# Altium PCB PCB2.PcbDoc (part 1 of 2)
Units mil, origin at the board's own origin, x right, y up, seen from the top; angles counter-clockwise.
Board outline 3235 x 2995 mil, 2 copper layers (Top Layer, Bottom Layer); 162 components, 122 nets, 435 pads, 185 vias.
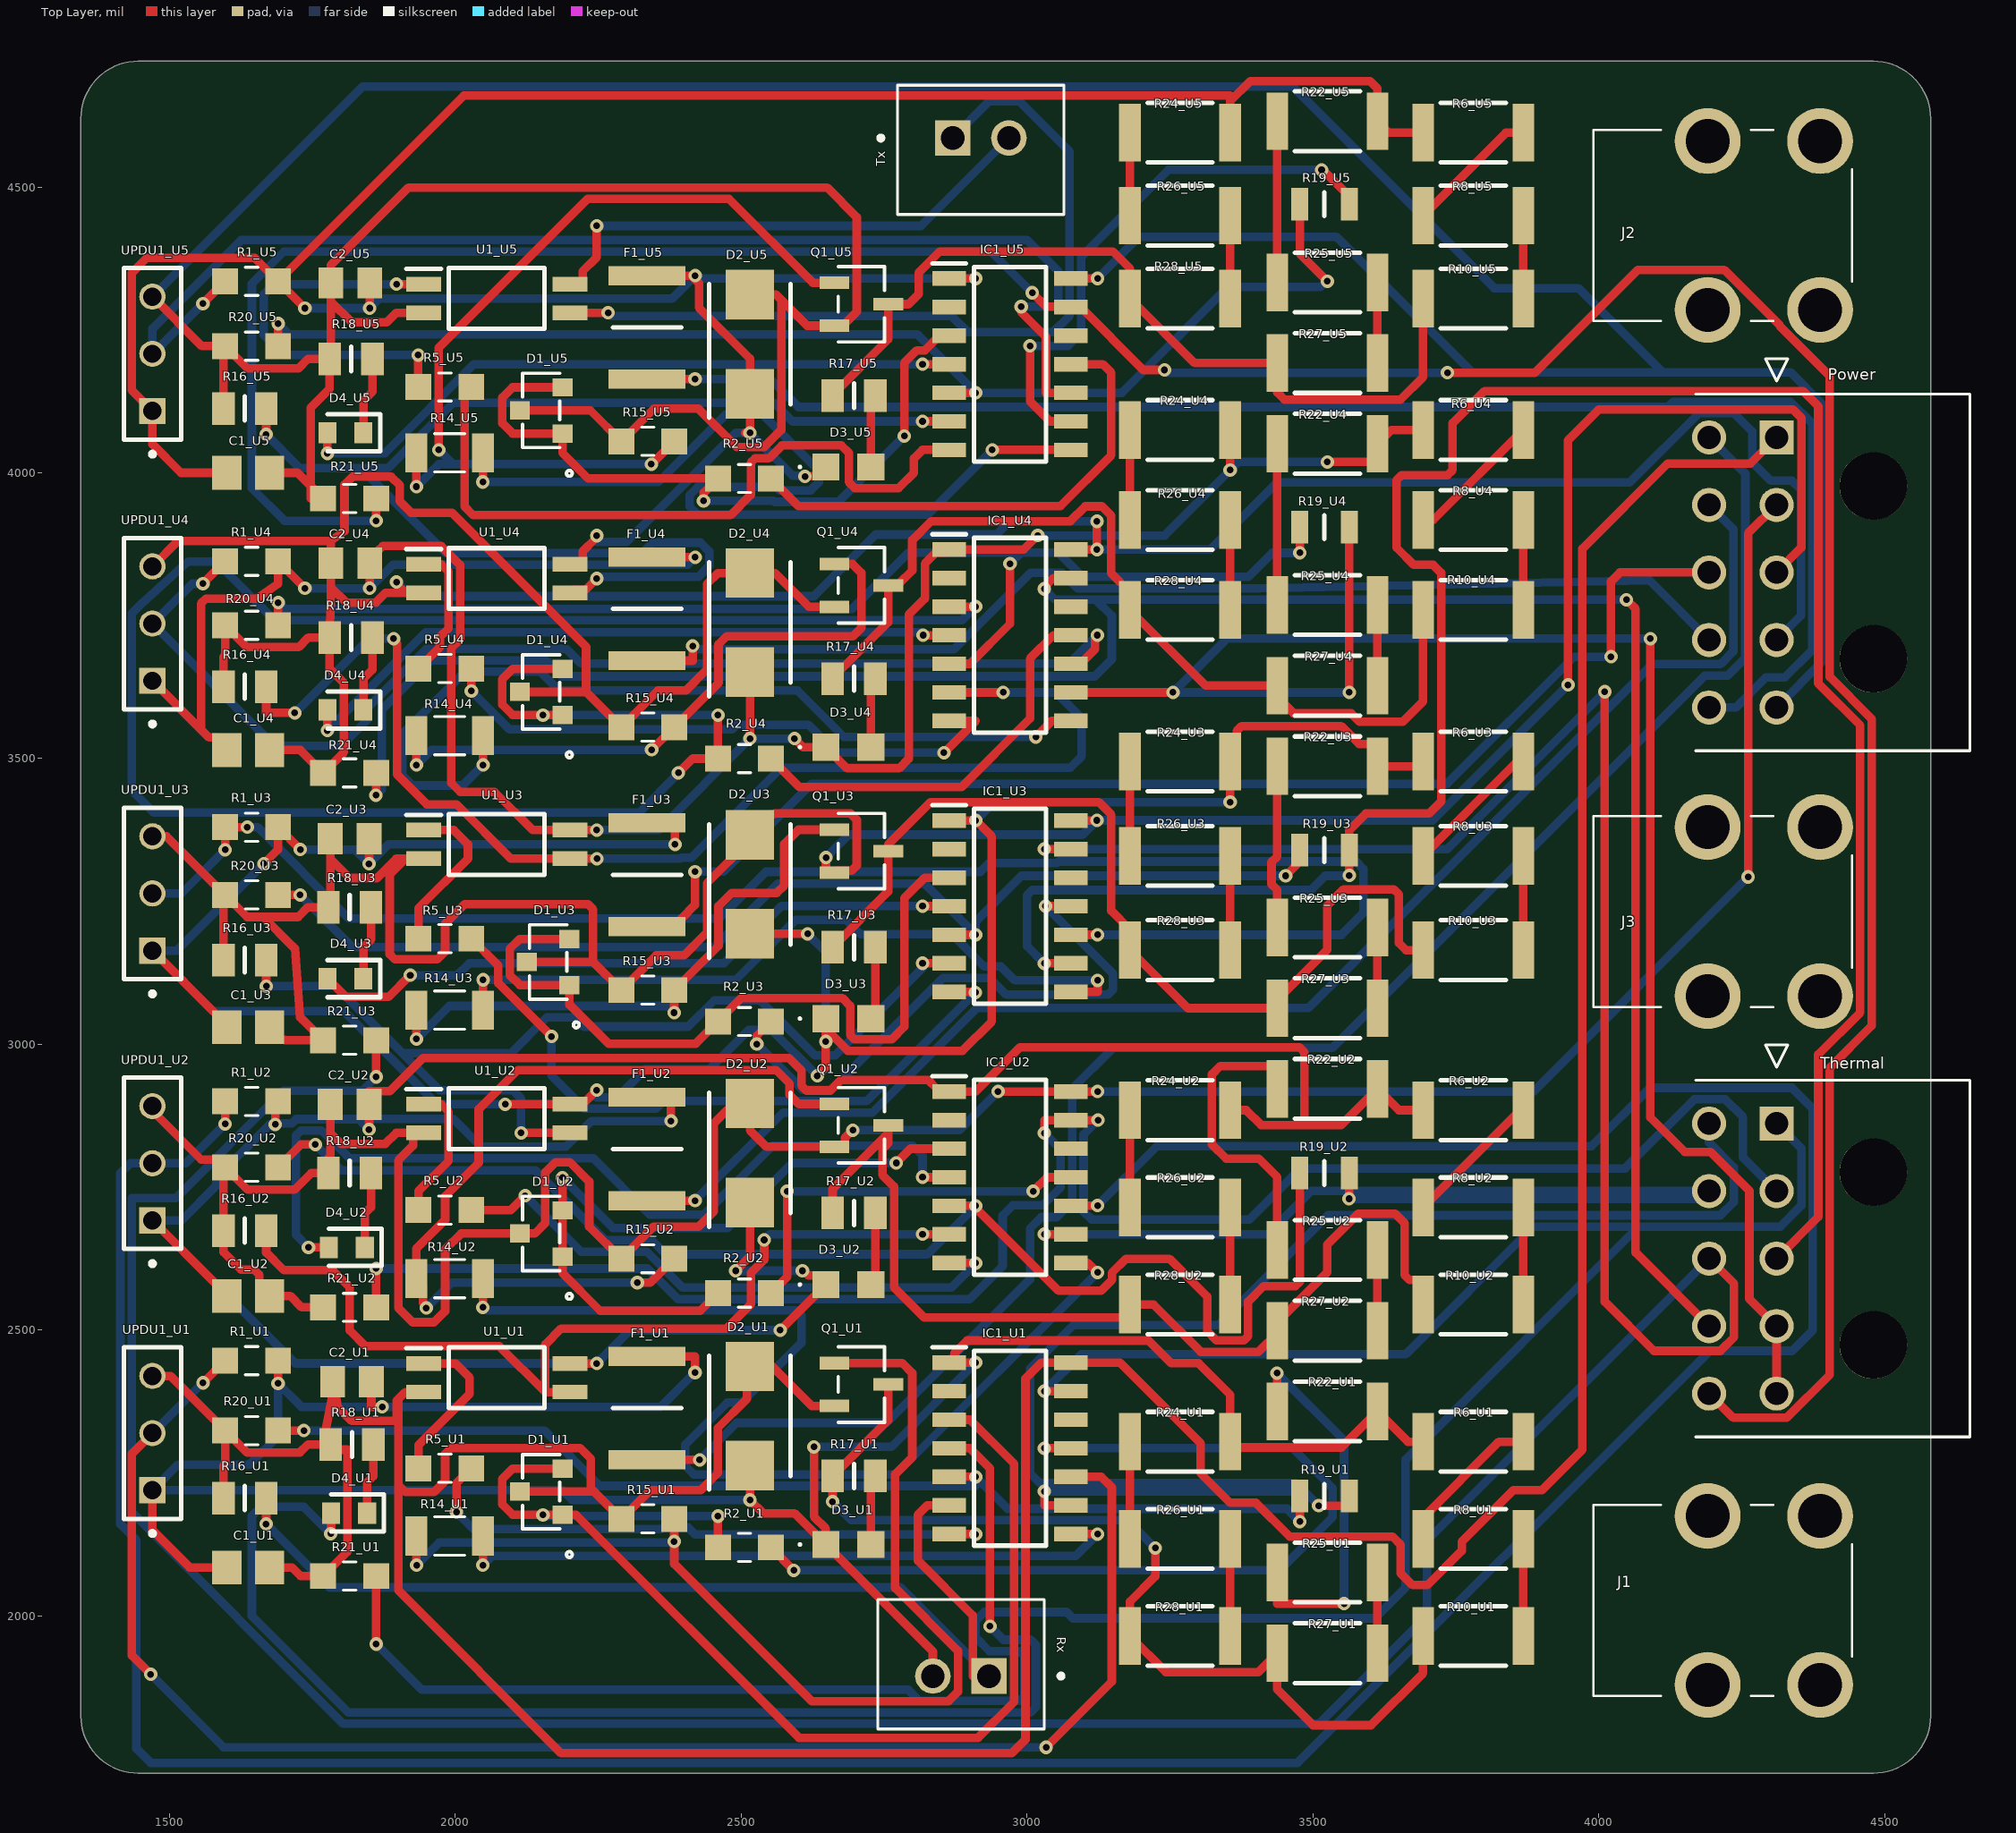
[diagram p0: Top Layer view]
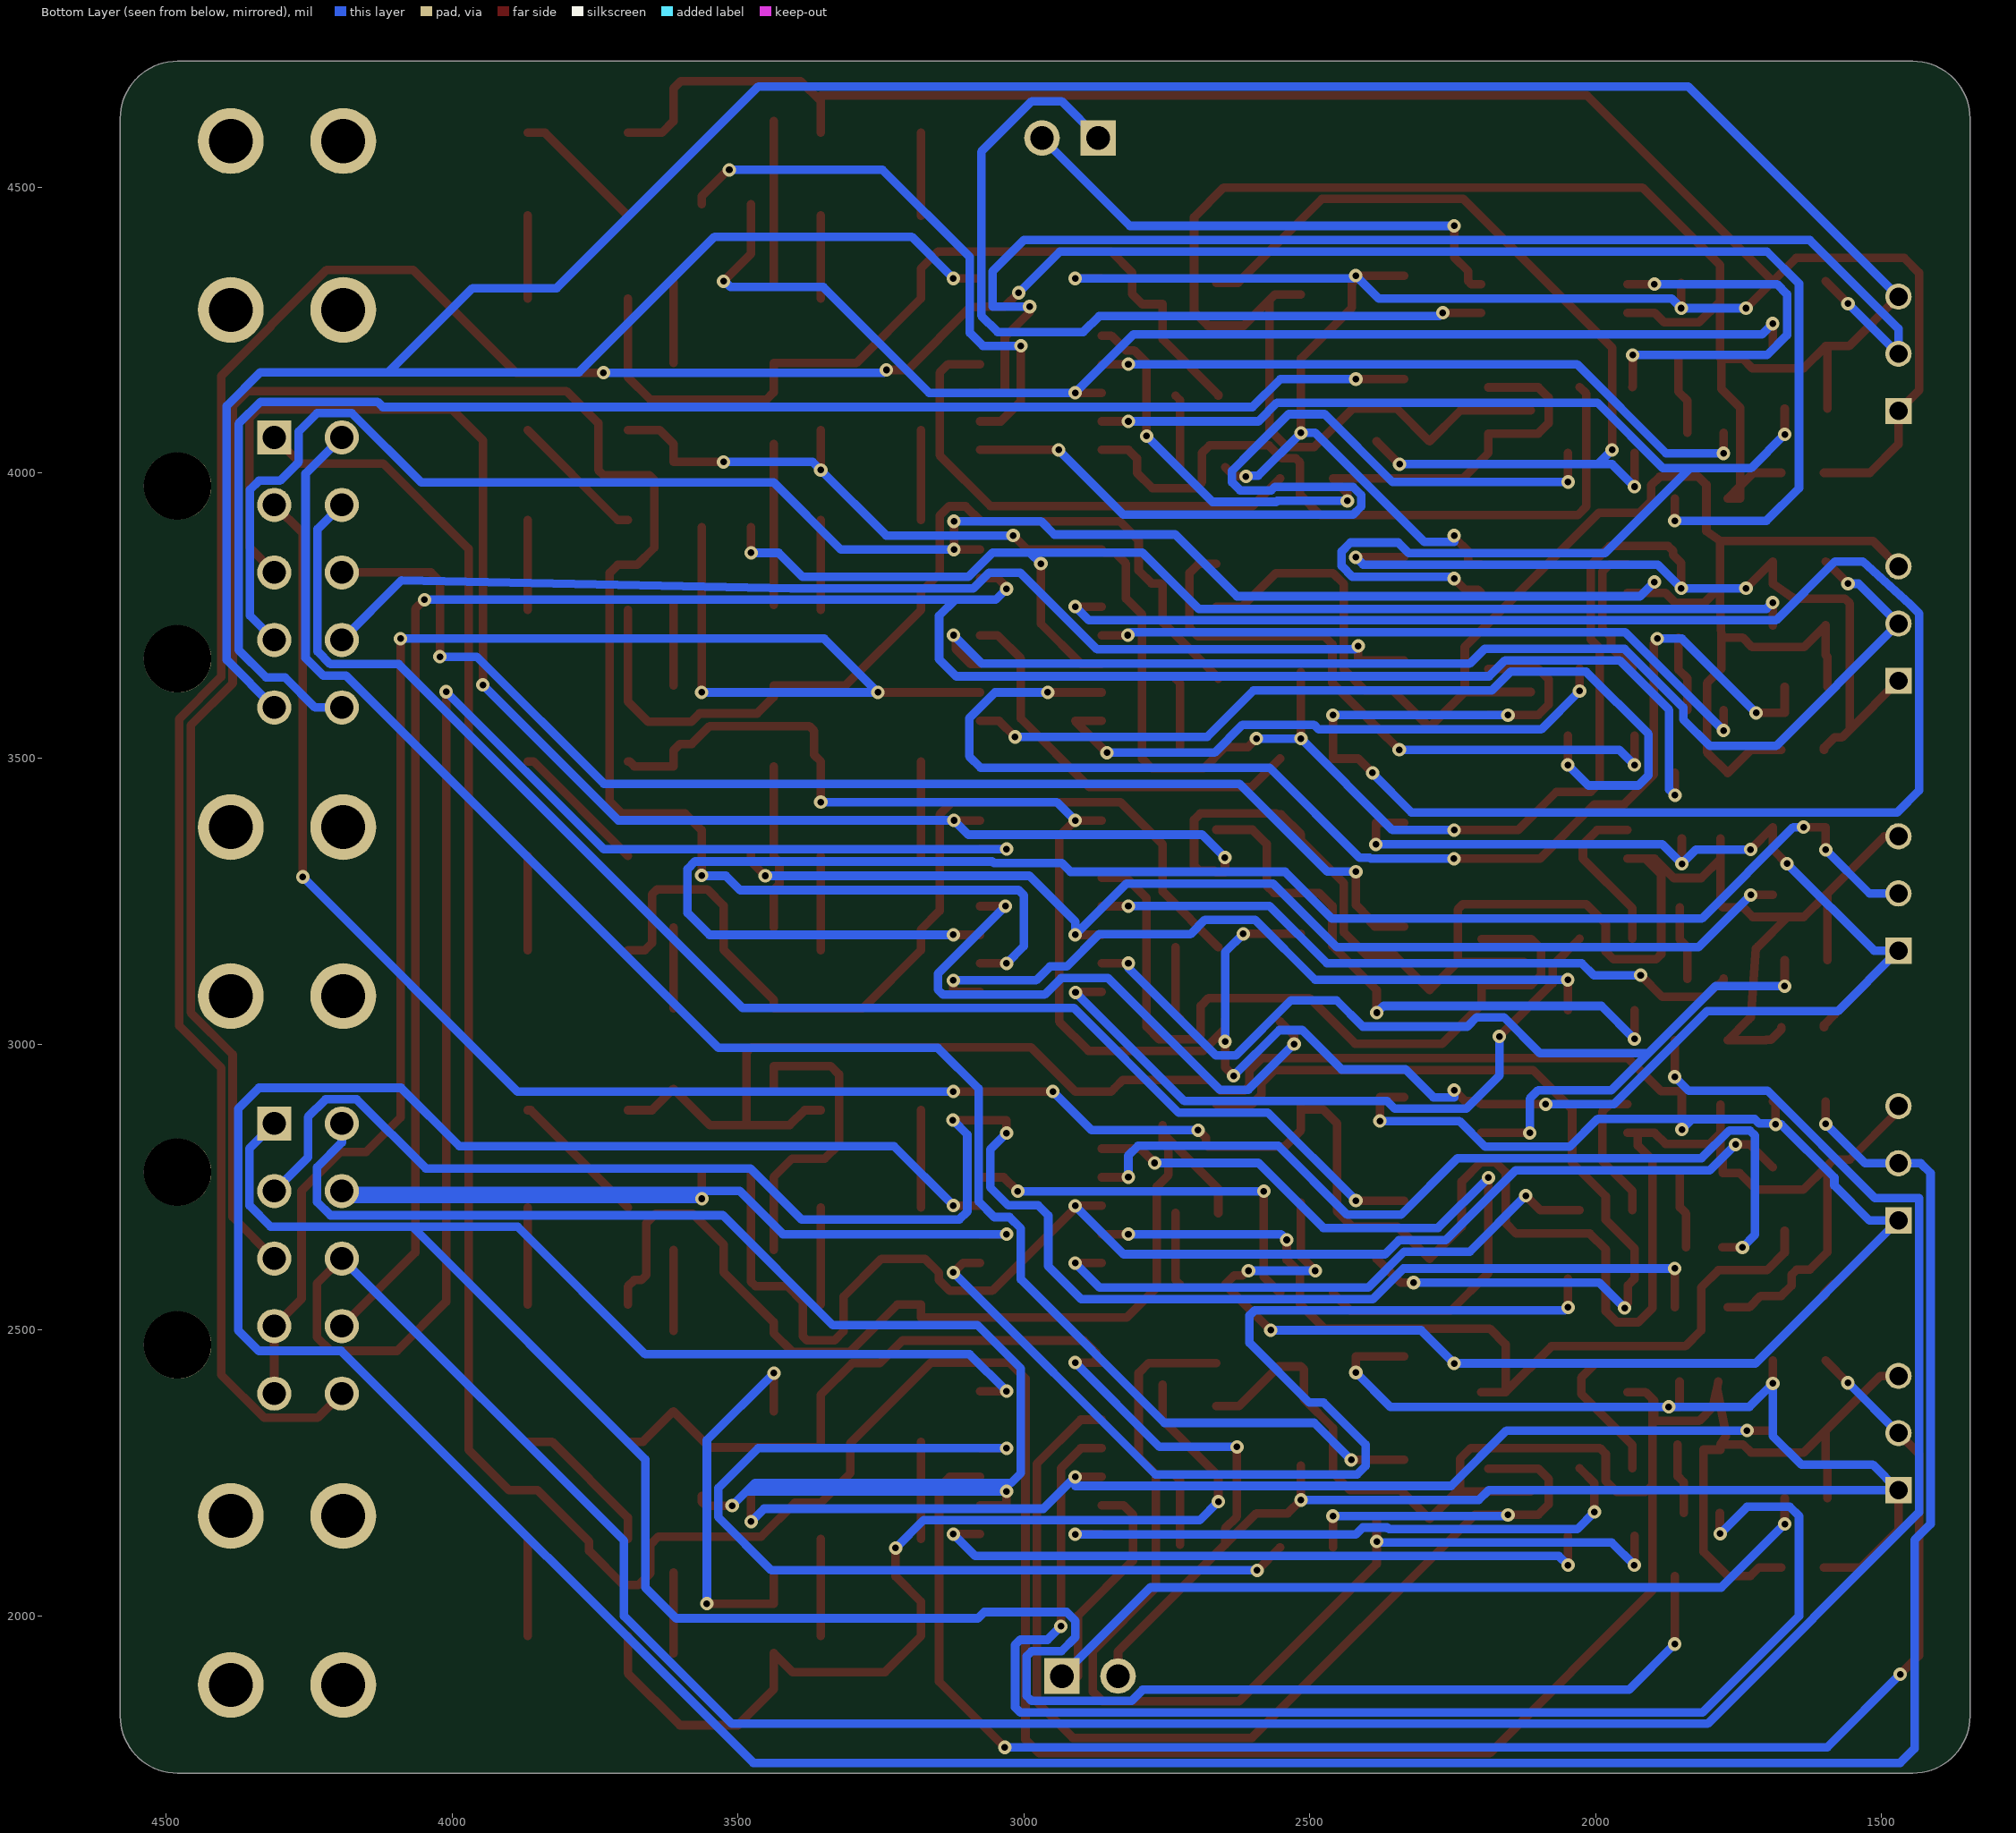
[diagram p1: Bottom Layer view, seen from below]
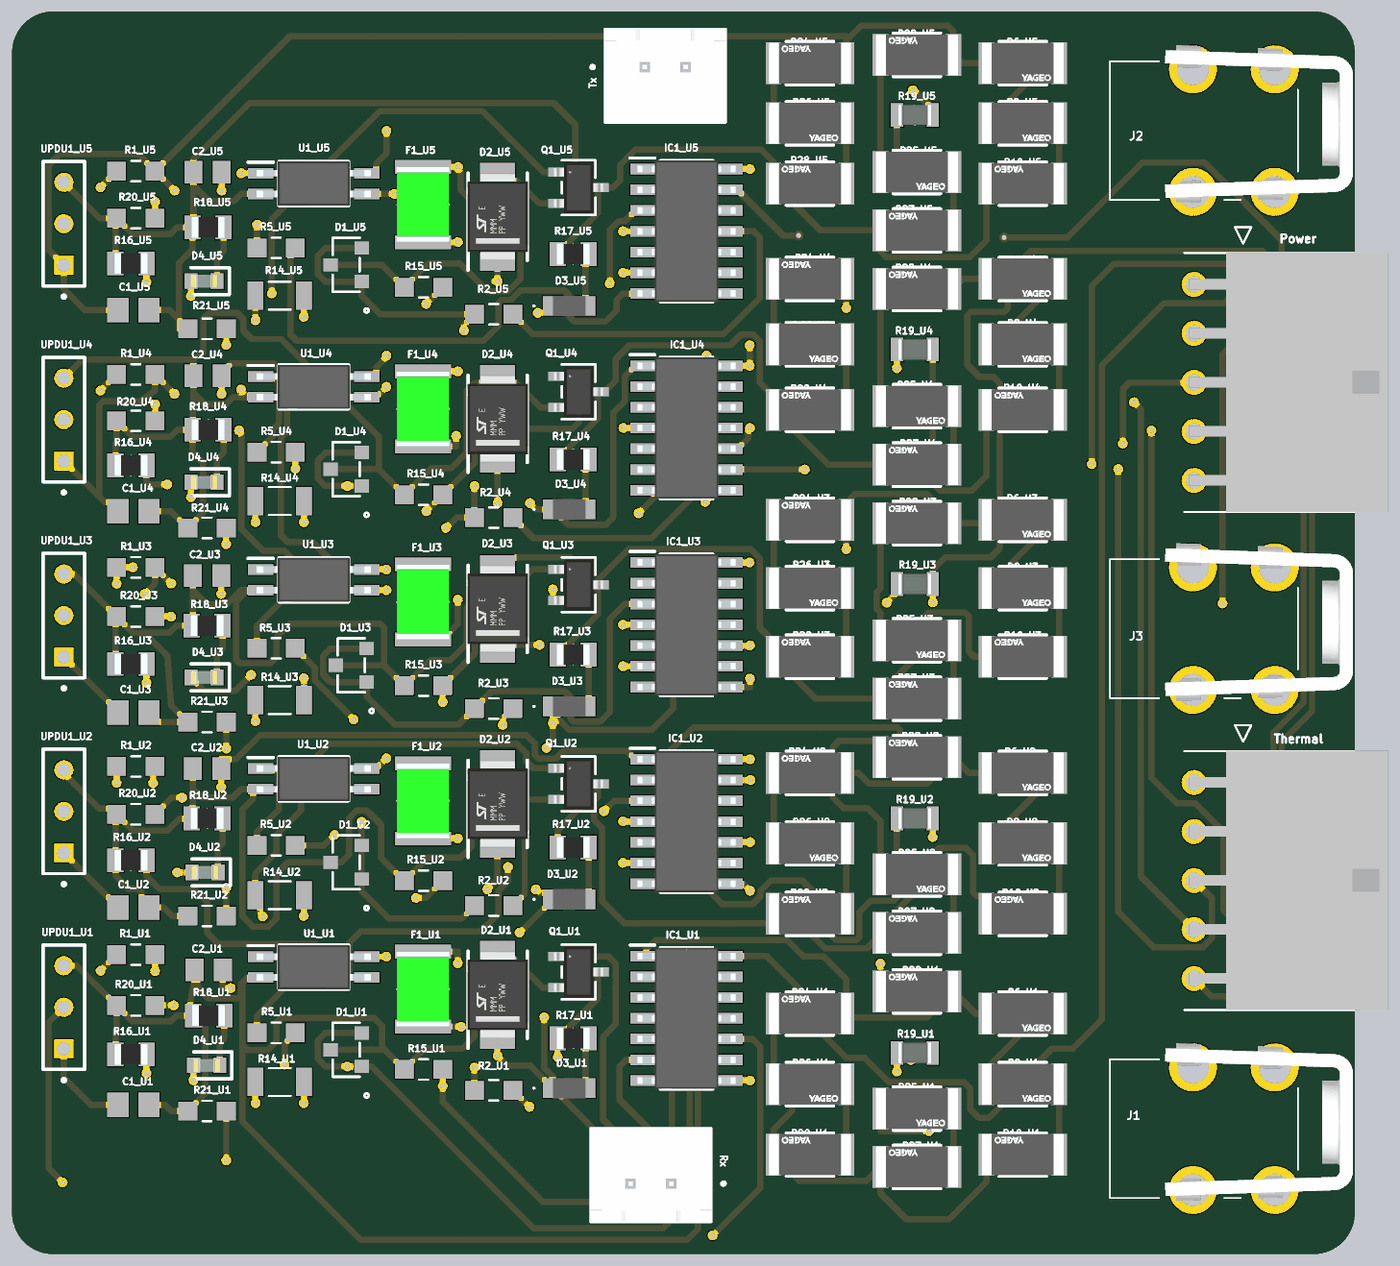
[diagram p3: 3D render of the assembled board from above, using the file's embedded part models]

## Layer stack, top to bottom
Top Solder: solder mask 0.4, Solder Resist, Dk 3.5
Top Layer: signal copper 1.4
Dielectric 1: dielectric 12.6, FR-4, Dk 4.8
Bottom Layer: signal copper 1.4
Bottom Solder: solder mask 0.4, Solder Resist, Dk 3.5

## Board outline
1345,1825 1345,4620 cw(c1445,4620) 1445,4720 4480,4720 cw(c4480,4620) 4580,4620 4580,1825 cw(c4480,1825) 4480,1725 1445,1725 cw(c1445,1825)

## Design rules (kind name [scope] priority, off if disabled: settings)
BoardOutlineClearance [All] p1: gap=7.87 ignorepadtopadclearanceinfootprint=FALSE
Clearance [All] p1: gap=5 ignorepadtopadclearanceinfootprint=FALSE except(9.84: Arc-Hole Track-Hole SMDPad-Hole THPad-Hole Via-Hole Fill-Hole Poly-Hole Region-Hole Text-Hole)
ComponentClearance [All] p1: gap=5 collisioncheckmode=3 verticalgap=5 showdistances=TRUE
DiffPairsRouting [All] p1: maxlimit=10 minlimit=5 mostfreqgap=5 toplayer_minwidth=5 toplayer_maxwidth=1000 toplayer_prefwidth=5 bottomlayer_minwidth=5 bottomlayer_maxwidth=1000 bottomlayer_prefwidth=5 maxuncoupledlength=500
Height [All] p1: minheight=0 maxheight=71497.94 prefheight=500
HoleSize [All] p1: absolutevalues=TRUE maxlimit=248.03 minlimit=11.81 maxpercent=80.000 minpercent=20.000
HoleToHoleClearance [All] p1: gap=9.84 allowstackedmicrovias=FALSE
MinimumAnnularRing [All] p1: minimumring=3
MinimumSolderMaskSliver [All] p1: minsoldermaskwidth=0
PlaneClearance [All] p1: clearance=5
PlaneConnect PlaneConnectPowerPads [InPadClass('PowerPads')] p1: planeconnectstyle=Direct reliefexpansion=20 reliefentries=4 reliefconductorwidth=10 reliefairgap=10
PlaneConnect [All] p2: pad.planeconnectstyle=Relief pad.reliefexpansion=11.81 pad.reliefentries=4 pad.reliefconductorwidth=5 pad.reliefairgap=5 via.planeconnectstyle=Direct via.reliefexpansion=11.81 via.reliefentries=4 via.reliefconductorwidth=5 via.reliefairgap=5
PolygonConnect PolygonConnectPowerPads [All vs (InPadClass('PowerPads'))] p1: connectstyle=Direct reliefconductorwidth=10 reliefentries=4 polygonreliefangle="90 Angle" airgapwidth=10
PolygonConnect [All] p2: thpad.connectstyle=Relief thpad.reliefconductorwidth=5 thpad.reliefentries=4 thpad.polygonreliefangle="90 Angle" thpad.airgapwidth=5 smdpad.connectstyle=Relief smdpad.reliefconductorwidth=5 smdpad.reliefentries=4 smdpad.polygonreliefangle="90 Angle" smdpad.airgapwidth=5 via.connectstyle=Direct via.reliefconductorwidth=5 via.reliefentries=4 via.polygonreliefangle="90 Angle" via.airgapwidth=5
RoutingVias [All] p1: holewidth=11.81 width=23.62 viastyle="Through Hole" minholewidth=11.81 minwidth=23.62 maxholewidth=23.62 maxwidth=259.84
SilkToSilkClearance [All] p1: silktosilkclearance=0
SilkToSolderMaskClearance [IsPad] p1: minsilkscreentomaskgap=5 clearancetoexposedcopper=TRUE
SolderMaskExpansion [All] p1: expansion=2.95 istentingtop=FALSE
Width [All] p1: maxlimit=1000 minlimit=15 preferedwidth=15 minimp=50.000000 maximp=50.000000 favimp=50.000000
20 further rules are at their usual default settings.

## Classes and differential pairs
channel class "Single cell module": U1 U2 U3 U4 U5
component class "Five cell modules": J1 J2 J3 Power Rx Thermal Tx

## Components (designator, comment, footprint, x,y, rotation, side; value= is the part's Value field where it differs from the comment)
C1_U1 "CC0805KRX7R9BB104" CAPC2012X70 1637.6,2085 r180 top (schematic designator C1)
C1_U2 "CC0805KRX7R9BB104" CAPC2012X70 1637.6,2560 r180 top (schematic designator C1)
C1_U3 "CC0805KRX7R9BB104" CAPC2012X70 1637.6,3030 r180 top (schematic designator C1)
C1_U4 "CC0805KRX7R9BB104" CAPC2012X70 1637.6,3515 r180 top (schematic designator C1)
C1_U5 "CC0805KRX7R9BB104" CAPC2012X70 1637.6,4000 r180 top (schematic designator C1)
C2_U1 "CL21A106KAYNNNE" CAPC2012X135N 1818.98,2410 r180 top (schematic designator C2)
C2_U2 "CL21A106KAYNNNE" CAPC2012X135N 1815,2895 r180 top (schematic designator C2)
C2_U3 "CL21A106KAYNNNE" CAPC2012X135N 1815,3360 r180 top (schematic designator C2)
C2_U4 "CL21A106KAYNNNE" CAPC2012X135N 1816.02,3841.99 r180 top (schematic designator C2)
C2_U5 "CL21A106KAYNNNE" CAPC2012X135N 1816.02,4331.99 r180 top (schematic designator C2)
D1_U1 "AZ432ANTR-E1" SOT-23_DIO 2150,2217.56 r90 top (schematic designator D1)
D1_U2 "AZ432ANTR-E1" SOT-23_DIO 2150,2669.27 r90 top (schematic designator D1)
D1_U3 "AZ432ANTR-E1" SOT-23_DIO 2162.21,3144.13 r90 top (schematic designator D1)
D1_U4 "AZ432ANTR-E1" SOT-23_DIO 2150,3616.63 r90 top (schematic designator D1)
D1_U5 "AZ432ANTR-E1" SOT-23_DIO 2150,4109.13 r90 top (schematic designator D1)
D2_U1 "SM6T6V8A" DIOM5436X265N 2515,2350 r90 top (schematic designator D2)
D2_U2 "SM6T6V8A" DIOM5436X265N 2515,2810 r90 top (schematic designator D2)
D2_U3 "SM6T6V8A" DIOM5436X265N 2515,3280 r90 top (schematic designator D2)
D2_U4 "SM6T6V8A" DIOM5436X265N 2515,3738 r90 top (schematic designator D2)
D2_U5 "SM6T6V8A" DIOM5436X265N 2515,4225 r90 top (schematic designator D2)
D3_U1 "598-2105-107F" 5982105107F 2687.2,2125 r180 top (schematic designator D3)
D3_U2 "598-2105-107F" 5982105107F 2687.2,2580 r180 top (schematic designator D3)
D3_U3 "598-2105-107F" 5982105107F 2687.2,3045 r180 top (schematic designator D3)
D3_U4 "598-2105-107F" 5982105107F 2687.2,3520 r180 top (schematic designator D3)
D3_U5 "598-2105-107F" 5982105107F 2687.2,4010 r180 top (schematic designator D3)
D4_U1 "19-217_GHC-YR1S2_3T" LEDC1608X50N 1813.98,2180 r180 top (schematic designator D4)
D4_U2 "19-217_GHC-YR1S2_3T" LEDC1608X50N 1810,2645 r180 top (schematic designator D4)
D4_U3 "19-217_GHC-YR1S2_3T" LEDC1608X50N 1807.64,3115 r180 top (schematic designator D4)
D4_U4 "19-217_GHC-YR1S2_3T" LEDC1608X50N 1807.64,3585 r180 top (schematic designator D4)
D4_U5 "19-217_GHC-YR1S2_3T" LEDC1608X50N 1807.64,4070 r180 top (schematic designator D4)
F1_U1 "MF-MSMF150-2" FUSC4632X85N 2335,2363.72 r90 top (schematic designator F1)
F1_U2 "MF-MSMF150-2" FUSC4632X85N 2335,2817.15 r90 top (schematic designator F1)
F1_U3 "MF-MSMF150-2" FUSC4632X85N 2335,3296.87 r90 top (schematic designator F1)
F1_U4 "MF-MSMF150-2" FUSC4632X85N 2335,3761.87 r90 top (schematic designator F1)
F1_U5 "MF-MSMF150-2" FUSC4632X85N 2335,4254.45 r90 top (schematic designator F1)
IC1_U1 "ATTINY1624-SSU" SOIC127P600X175-14N 2970,2293.45 r0 top (schematic designator IC1)
IC1_U2 "ATTINY1624-SSU" SOIC127P600X175-14N 2970,2767.58 r0 top (schematic designator IC1)
IC1_U3 "ATTINY1624-SSU" SOIC127P600X175-14N 2970,3241.72 r0 top (schematic designator IC1)
IC1_U4 "ATTINY1624-SSU" SOIC127P600X175-14N 2970,3715.86 r0 top (schematic designator IC1)
IC1_U5 "ATTINY1624-SSU" SOIC127P600X175-14N 2970,4190 r0 top (schematic designator IC1)
J1 "7790" 7790 4190,1879.72 r90 top
J2 "7790" 7790 4190,4285 r90 top
J3 "7790" 7790 4190,3084.68 r90 top
Power "212528-1001" 212528-10YY_1 4310.71,4061.94 r90 top
Q1_U1 "AO3400A" SOT-23-3L_AOS 2710,2404.96 r270 top (schematic designator Q1)
Q1_U2 "AO3400A" SOT-23-3L_AOS 2710,2858.38 r270 top (schematic designator Q1)
Q1_U3 "AO3400A" SOT-23-3L_AOS 2710,3338.11 r270 top (schematic designator Q1)
Q1_U4 "AO3400A" SOT-23-3L_AOS 2710,3803.11 r270 top (schematic designator Q1)
Q1_U5 "AO3400A" SOT-23-3L_AOS 2710,4295 r270 top (schematic designator Q1)
R1_U1 "ERA6ARW104V" RES_ERA6ARW104V 1643.5,2446.85 r0 top (schematic designator R1)
R1_U2 "ERA6ARW104V" RES_ERA6ARW104V 1643.5,2900.28 r0 top (schematic designator R1)
R1_U3 "ERA6ARW104V" RES_ERA6ARW104V 1643.5,3380 r0 top (schematic designator R1)
R1_U4 "ERA6ARW104V" RES_ERA6ARW104V 1643.5,3845 r0 top (schematic designator R1)
R1_U5 "ERA6ARW104V" RES_ERA6ARW104V 1643.5,4335 r0 top (schematic designator R1)
R2_U1 "ERJU06J102V" RES_ERJU06J102V 2505.5,2120 r0 top (schematic designator R2)
R2_U2 "ERJU06J102V" RES_ERJU06J102V 2505.5,2565 r0 top (schematic designator R2)
R2_U3 "ERJU06J102V" RES_ERJU06J102V 2505.5,3040 r0 top (schematic designator R2)
R2_U4 "ERJU06J102V" RES_ERJU06J102V 2505.5,3500 r0 top (schematic designator R2)
R2_U5 "ERJU06J102V" RES_ERJU06J102V 2505.5,3990 r0 top (schematic designator R2)
R5_U1 "ERJ6ENF1800V" RES_ERJ6ENF1800V 1981.53,2258.49 r180 top (schematic designator R5)
R5_U2 "ERJ6ENF1800V" RES_ERJ6ENF1800V 1981.53,2710.21 r180 top (schematic designator R5)
R5_U3 "ERJ6ENF1800V" RES_ERJ6ENF1800V 1981.53,3185.07 r180 top (schematic designator R5)
R5_U4 "ERJ6ENF1800V" RES_ERJ6ENF1800V 1981.53,3657.57 r180 top (schematic designator R5)
R5_U5 "ERJ6ENF1800V" RES_ERJ6ENF1800V 1981.53,4150.07 r180 top (schematic designator R5)
R6_U1 "RC2010JK-070RL" FP-RC2010-0_65-IPC_C 3780,2305 r0 top (schematic designator R6)
R6_U2 "RC2010JK-070RL" FP-RC2010-0_65-IPC_C 3780,2885 r0 top (schematic designator R6)
R6_U3 "RC2010JK-070RL" FP-RC2010-0_65-IPC_C 3780,3495 r0 top (schematic designator R6)
R6_U4 "RC2010JK-070RL" FP-RC2010-0_65-IPC_C 3780,4075 r0 top (schematic designator R6)
R6_U5 "RC2010JK-070RL" FP-RC2010-0_65-IPC_C 3780,4595 r0 top (schematic designator R6)
R8_U1 "RC2010JK-070RL" FP-RC2010-0_65-IPC_C 3780,2135 r0 top (schematic designator R8)
R8_U2 "RC2010JK-070RL" FP-RC2010-0_65-IPC_C 3780,2715 r0 top (schematic designator R8)
R8_U3 "RC2010JK-070RL" FP-RC2010-0_65-IPC_C 3780,3330 r0 top (schematic designator R8)
R8_U4 "RC2010JK-070RL" FP-RC2010-0_65-IPC_C 3780,3917.5 r0 top (schematic designator R8)
R8_U5 "RC2010JK-070RL" FP-RC2010-0_65-IPC_C 3780,4450 r0 top (schematic designator R8)
R10_U1 "RC2010JK-070RL" FP-RC2010-0_65-IPC_C 3780,1965 r180 top (schematic designator R10)
R10_U2 "RC2010JK-070RL" FP-RC2010-0_65-IPC_C 3780,2545 r180 top (schematic designator R10)
R10_U3 "RC2010JK-070RL" FP-RC2010-0_65-IPC_C 3780,3165 r180 top (schematic designator R10)
R10_U4 "RC2010JK-070RL" FP-RC2010-0_65-IPC_C 3780,3760 r180 top (schematic designator R10)
R10_U5 "RC2010JK-070RL" FP-RC2010-0_65-IPC_C 3780,4305 r180 top (schematic designator R10)
R14_U1 "RT1206DRD07510RL" RESC3116X65N 1990,2140 r180 top (schematic designator R14)
R14_U2 "RT1206DRD07510RL" RESC3116X65N 1990,2590 r180 top (schematic designator R14)
R14_U3 "RT1206DRD07510RL" RESC3116X65N 1990,3060 r180 top (schematic designator R14)
R14_U4 "RT1206DRD07510RL" RESC3116X65N 1990,3540 r180 top (schematic designator R14)
R14_U5 "RT1206DRD07510RL" RESC3116X65N 1990,4035 r180 top (schematic designator R14)
R15_U1 "ERJP06D1002V" RES_ERJP06D1002V 2336.38,2170 r180 top (schematic designator R15)
R15_U2 "ERJP06D1002V" RES_ERJP06D1002V 2336.38,2625 r180 top (schematic designator R15)
R15_U3 "ERJP06D1002V" RES_ERJP06D1002V 2336.38,3095 r180 top (schematic designator R15)
R15_U4 "ERJP06D1002V" RES_ERJP06D1002V 2336.38,3555 r180 top (schematic designator R15)
R15_U5 "ERJP06D1002V" RES_ERJP06D1002V 2336.38,4055 r180 top (schematic designator R15)
R16_U1 "0805W8F2201T5E" RESC2013X65N 1631.69,2206.42 r0 top (schematic designator R16)
R16_U2 "0805W8F2201T5E" RESC2013X65N 1631.69,2674.23 r0 top (schematic designator R16)
R16_U3 "0805W8F2201T5E" RESC2013X65N 1631.69,3147.47 r0 top (schematic designator R16)
R16_U4 "0805W8F2201T5E" RESC2013X65N 1631.69,3625.81 r0 top (schematic designator R16)
R16_U5 "0805W8F2201T5E" RESC2013X65N 1631.69,4112.47 r0 top (schematic designator R16)
R17_U1 "0805W8F2201T5E" RESC2013X65N 2697.04,2245 r180 top (schematic designator R17)
R17_U2 "0805W8F2201T5E" RESC2013X65N 2697.04,2705 r180 top (schematic designator R17)
R17_U3 "0805W8F2201T5E" RESC2013X65N 2697.04,3170 r180 top (schematic designator R17)
R17_U4 "0805W8F2201T5E" RESC2013X65N 2697.04,3640 r180 top (schematic designator R17)
R17_U5 "0805W8F2201T5E" RESC2013X65N 2697.04,4135 r180 top (schematic designator R17)
R18_U1 "0805W8F2201T5E" RESC2013X65N 1818.98,2300 r180 top (schematic designator R18)
R18_U2 "0805W8F2201T5E" RESC2013X65N 1815,2775 r180 top (schematic designator R18)
R18_U3 "0805W8F2201T5E" RESC2013X65N 1815,3240 r180 top (schematic designator R18)
R18_U4 "0805W8F2201T5E" RESC2013X65N 1817.48,3711.72 r180 top (schematic designator R18)
R18_U5 "0805W8F2201T5E" RESC2013X65N 1817.48,4199.22 r180 top (schematic designator R18)
R19_U1 "NTCS0805E3104GMT" THRMC2012X95N 3520,2210 r180 top (schematic designator R19)
R19_U2 "NTCS0805E3104GMT" THRMC2012X95N 3520,2775 r180 top (schematic designator R19)
R19_U3 "NTCS0805E3104GMT" THRMC2012X95N 3520,3340 r180 top (schematic designator R19)
R19_U4 "NTCS0805E3104GMT" THRMC2012X95N 3520,3905 r180 top (schematic designator R19)
R19_U5 "NTCS0805E3104GMT" THRMC2012X95N 3520,4470 r180 top (schematic designator R19)
R20_U1 "ERJP06D1002V" RES_ERJP06D1002V 1643.5,2324.44 r0 top (schematic designator R20)
R20_U2 "ERJP06D1002V" RES_ERJP06D1002V 1643.5,2785.06 r0 top (schematic designator R20)
R20_U3 "ERJP06D1002V" RES_ERJP06D1002V 1643.5,3261.54 r0 top (schematic designator R20)
R20_U4 "ERJP06D1002V" RES_ERJP06D1002V 1643.5,3733.21 r0 top (schematic designator R20)
R20_U5 "ERJP06D1002V" RES_ERJP06D1002V 1643.5,4221.54 r0 top (schematic designator R20)
R21_U1 "ERJP06D1002V" RES_ERJP06D1002V 1815,2070 r0 top (schematic designator R21)
R21_U2 "ERJP06D1002V" RES_ERJP06D1002V 1815,2540 r0 top (schematic designator R21)
R21_U3 "ERJP06D1002V" RES_ERJP06D1002V 1815,3007.26 r0 top (schematic designator R21)
R21_U4 "ERJP06D1002V" RES_ERJP06D1002V 1815,3475 r0 top (schematic designator R21)
R21_U5 "ERJP06D1002V" RES_ERJP06D1002V 1815,3955 r0 top (schematic designator R21)
R22_U1 "RC2010JK-070RL" FP-RC2010-0_65-IPC_C 3525,2358.16 r180 top (schematic designator R22)
R22_U2 "RC2010JK-070RL" FP-RC2010-0_65-IPC_C 3525,2922.37 r180 top (schematic designator R22)
R22_U3 "RC2010JK-070RL" FP-RC2010-0_65-IPC_C 3525,3486.58 r180 top (schematic designator R22)
R22_U4 "RC2010JK-070RL" FP-RC2010-0_65-IPC_C 3525,4050.79 r180 top (schematic designator R22)
R22_U5 "RC2010JK-070RL" FP-RC2010-0_65-IPC_C 3525,4615 r180 top (schematic designator R22)
R24_U1 "RC2010JK-070RL" FP-RC2010-0_65-IPC_C 3267.32,2305 r180 top (schematic designator R24)
R24_U2 "RC2010JK-070RL" FP-RC2010-0_65-IPC_C 3267.32,2885 r180 top (schematic designator R24)
R24_U3 "RC2010JK-070RL" FP-RC2010-0_65-IPC_C 3267.32,3495 r180 top (schematic designator R24)
R24_U4 "RC2010JK-070RL" FP-RC2010-0_65-IPC_C 3267.32,4075 r180 top (schematic designator R24)
R24_U5 "RC2010JK-070RL" FP-RC2010-0_65-IPC_C 3267.32,4595 r180 top (schematic designator R24)
R25_U1 "RC2010JK-070RL" FP-RC2010-0_65-IPC_C 3525,2076.05 r0 top (schematic designator R25)
R25_U2 "RC2010JK-070RL" FP-RC2010-0_65-IPC_C 3525,2640.26 r0 top (schematic designator R25)
R25_U3 "RC2010JK-070RL" FP-RC2010-0_65-IPC_C 3525,3204.47 r0 top (schematic designator R25)
R25_U4 "RC2010JK-070RL" FP-RC2010-0_65-IPC_C 3525,3768.68 r0 top (schematic designator R25)
R25_U5 "RC2010JK-070RL" FP-RC2010-0_65-IPC_C 3525,4332.89 r0 top (schematic designator R25)
R26_U1 "RC2010JK-070RL" FP-RC2010-0_65-IPC_C 3267.32,2135 r0 top (schematic designator R26)
R26_U2 "RC2010JK-070RL" FP-RC2010-0_65-IPC_C 3267.32,2715 r0 top (schematic designator R26)
R26_U3 "RC2010JK-070RL" FP-RC2010-0_65-IPC_C 3267.32,3330 r0 top (schematic designator R26)
R26_U4 "RC2010JK-070RL" FP-RC2010-0_65-IPC_C 3267.32,3917.5 r0 top (schematic designator R26)
R26_U5 "RC2010JK-070RL" FP-RC2010-0_65-IPC_C 3267.32,4450 r0 top (schematic designator R26)
R27_U1 "RC2010JK-070RL" FP-RC2010-0_65-IPC_C 3525,1935 r180 top (schematic designator R27)
R27_U2 "RC2010JK-070RL" FP-RC2010-0_65-IPC_C 3525,2499.21 r180 top (schematic designator R27)
R27_U3 "RC2010JK-070RL" FP-RC2010-0_65-IPC_C 3525,3063.42 r180 top (schematic designator R27)
R27_U4 "RC2010JK-070RL" FP-RC2010-0_65-IPC_C 3525,3627.63 r180 top (schematic designator R27)
R27_U5 "RC2010JK-070RL" FP-RC2010-0_65-IPC_C 3525,4191.84 r180 top (schematic designator R27)
R28_U1 "RC2010JK-070RL" FP-RC2010-0_65-IPC_C 3267.32,1965 r180 top (schematic designator R28)
R28_U2 "RC2010JK-070RL" FP-RC2010-0_65-IPC_C 3267.32,2545 r180 top (schematic designator R28)
R28_U3 "RC2010JK-070RL" FP-RC2010-0_65-IPC_C 3267.32,3165 r180 top (schematic designator R28)
R28_U4 "RC2010JK-070RL" FP-RC2010-0_65-IPC_C 3267.32,3760 r180 top (schematic designator R28)
R28_U5 "RC2010JK-070RL" FP-RC2010-0_65-IPC_C 3267.32,4305 r180 top (schematic designator R28)
Rx "B2B-XH-A(LF)(SN)" JST_B2B-XH-A(LF)(SN) 2884.21,1915.67 r0 top
Thermal "212528-1001" 212528-10YY_1 4310.71,2861.62 r90 top
Tx "B2B-XH-A(LF)(SN)" JST_B2B-XH-A(LF)(SN) 2918.72,4565 r180 top
U1_U1 "EL3H7_B__TA_-G" SOIC127P700X200-4N 2072.09,2416.87 r0 top (schematic designator U1)
U1_U2 "EL3H7_B__TA_-G" SOIC127P700X200-4N 2072.09,2870.29 r0 top (schematic designator U1)
U1_U3 "EL3H7_B__TA_-G" SOIC127P700X200-4N 2072.09,3350.02 r0 top (schematic designator U1)
U1_U4 "EL3H7_B__TA_-G" SOIC127P700X200-4N 2072.09,3815.02 r0 top (schematic designator U1)
U1_U5 "EL3H7_B__TA_-G" SOIC127P700X200-4N 2072.09,4305.02 r0 top (schematic designator U1)
UPDU1_U1 "TS-103-T-A-1" SAMTEC_TS-103-T-A-1 1470,2320.02 r90 top (schematic designator UPDU1)
UPDU1_U2 "TS-103-T-A-1" SAMTEC_TS-103-T-A-1 1470,2792.06 r90 top (schematic designator UPDU1)
UPDU1_U3 "TS-103-T-A-1" SAMTEC_TS-103-T-A-1 1470,3264.09 r90 top (schematic designator UPDU1)
UPDU1_U4 "TS-103-T-A-1" SAMTEC_TS-103-T-A-1 1470,3736.13 r90 top (schematic designator UPDU1)
UPDU1_U5 "TS-103-T-A-1" SAMTEC_TS-103-T-A-1 1470,4208.17 r90 top (schematic designator UPDU1)

## Footprints (in the part's own frame and the unit in brackets; to place one, negate y for a bottom-side part, rotate by r counter-clockwise, add the part's x,y. Pads: shape width x height; smd on the part's side, far side on the other; paste and mask are expansions set on the pad)
7790 [mm]
  round 2.925 hole 1.95: 1(0,0) 2(7.5,0) 3(0,-5) 4(7.5,-5)
  silkscreen extent -0.5,-6.42 8,5.08, body extent -0.67,-9.8 8.97,1.71, height 11.73
212528-10YY_1 [mm]
  rect 1.52x1.52 hole 1.02: 1(0,0)
  round 1.52 hole 1.02: 2(-3,0) 3(-6,0) 4(-9,0) 5(-12,0) 6(0,3) 7(-3,3) 8(-6,3) 9(-9,3) 10(-12,3)
  round 3 hole 3 unplated: 11(-2.16,-4.3) 12(-9.84,-4.3)
  silkscreen extent -13.93,-8.59 3.5,3.59, body extent -13.92,-8.88 1.93,3.3, height 8.75
5982105107F [mm]
  rect 1.2x1.2 smd: 1(1,0) 2(-1,0)
  silkscreen extent 2.1,-0.05 2.2,0.05, body extent -1,-0.63 1,0.63, height 0.91
CAPC2012X70 [mm]
  rect 1.3x1.5 smd: 1(-0.95,0) 2(0.95,0)
CAPC2012X135N [mm]
  rect 1.1x1.38 smd: 1(-0.863,0) 2(0.863,0)
DIOM5436X265N [mm]
  rect 2.2x2.15 smd: 1(-2.2,0) 2(2.2,0)
  silkscreen extent -3.27,-1.81 2.68,1.81, body extent -2.68,-1.86 2.68,1.86, height 2.33
FP-RC2010-0_65-IPC_C [mil]
  rect 37.72x100.72 smd paste+0 mask+0: 1(-87.68,0) 2(87.68,0)
  silkscreen extent -57,-52 57,52, body extent -110,-56 110,56, height 10
FUSC4632X85N [mm]
  rect 0.85x3.43 smd: 1(-2.3,0) 2(2.3,0)
  silkscreen extent 0,-1.52 0,1.52, body extent -2.27,-1.62 2.27,1.62, height 0.85
JST_B2B-XH-A(LF)(SN) [mm]
  rect 1.575x1.575 / inner round 1.575 / far side rect 1.575x1.575 hole 1.05: 1(1.25,-0.525)
  round 1.575 hole 1.05: 2(-1.25,-0.525)
  silkscreen extent -3.7,-2.87 4.54,2.88, body extent -3.7,-2.88 3.7,2.88, height 7
LEDC1608X50N [mm]
  rect 0.8x0.95 smd: 1(-0.8,0) 2(0.8,0)
  silkscreen extent -1.55,-0.82 0.8,0.82, body extent -0.82,-0.4 0.82,0.4, height 0.4
RES_ERA6ARW104V [mm]
  rect 1.15x1.15 smd: 1(-1.175,0) 2(1.175,0)
  silkscreen extent -0.28,-0.62 0.28,0.62
RES_ERJ6ENF1800V [mm]
  rect 1.15x1.15 smd: 1(-1.175,0) 2(1.175,0)
  silkscreen extent -0.28,-0.63 0.28,0.62
RES_ERJP06D1002V [mm]
  rect 1.15x1.15 smd: 1(-1.175,0) 2(1.175,0)
  silkscreen extent -0.28,-0.62 0.28,0.62
RES_ERJU06J102V [mm]
  rect 1.15x1.15 smd: 1(-1.175,0) 2(1.175,0)
  silkscreen extent -0.28,-0.62 0.28,0.62
RESC2013X65N [mm]
  rect 1x1.45 smd: 1(-0.95,0) 2(0.95,0)
  silkscreen extent 0,-0.54 0,0.54, body extent -1,-0.64 1,0.64, height 0.65
RESC3116X65N [mm]
  rect 0.97x1.73 smd: 1(-1.48,0) 2(1.48,0)
  silkscreen extent -0.67,-0.85 0.67,0.85
SAMTEC_TS-103-T-A-1 [mil]
  rect 45.78x45.78 / inner round 45.78 / far side rect 45.78x45.78 hole 32: 01(-100,0)
  round 45.78 hole 32: 02(0,0) 03(100,0)
  silkscreen extent -180,-50 150,50
SOIC127P600X175-14N [mm]
  rect 1.5x0.65 smd: 1(-2.7,3.81) 2(-2.7,2.54) 3(-2.7,1.27) 4(-2.7,0) 5(-2.7,-1.27) 6(-2.7,-2.54) 7(-2.7,-3.81) 8(2.7,-3.81) 9(2.7,-2.54) 10(2.7,-1.27) 11(2.7,0) 12(2.7,1.27) 13(2.7,2.54) 14(2.7,3.81)
  silkscreen extent -3.45,-4.32 1.6,4.49, body extent -3,-4.33 3,4.33, height 1.75
SOIC127P700X200-4N [mm]
  rect 1.55x0.65 smd: 1(-3.25,0.635) 2(-3.25,-0.635) 3(3.25,-0.635) 4(3.25,0.635)
  silkscreen extent -4.02,-1.35 2.13,1.35, body extent -3.5,-1.35 3.5,1.35, height 2
SOT-23-3L_AOS [mil]
  rect 22x52 smd paste+0 mask+0: 1(-37.5,-47) 2(37.5,-47) 3(0,47)
  silkscreen extent -66,-41 66,41, body extent -61,-59 61,59, height 49
SOT-23_DIO [mil]
  rect 32x35 smd paste+0 mask+0: 1(-40.35,-37.2) 2(40.36,-37.2) 3(0,37.21)
  silkscreen extent -115,-54 65,33
THRMC2012X95N [mm]
  rect 0.75x1.45 smd: 1(-1.1,0) 2(1.1,0)
  silkscreen extent 0,-0.53 0,0.53, body extent -1,-0.63 1,0.63, height 0.95

## Part data
C1_U1 C1_U2 C1_U3 C1_U4 C1_U5: "0.1ÂµF Â±10% 50V Ceramic Capacitor X7R 0805 _2012 Metric_", Package="0805 Yageo", Availability=Unavailable, MF=Yageo, MP=CC0805KRX7R9BB104, Price=None, SnapEDA_Link=https://www.snapeda.com/parts/CC0805KRX7R9BB104/Yageo/view-part/105548/?ref=snap
C2_U1 C2_U2 C2_U3 C2_U4 C2_U5: "10ÂµF Â±10% 25V Ceramic Capacitor X5R 0805 (2012 Metric)", Package="0805 Samsung", Check_prices=https://www.snapeda.com/parts/CL21A106KAYNNNE/Samsung/view-part/3598482/?ref=eda, Digi-Key_Part_Number=1276-2891-1-ND, MF=Samsung, MP=CL21A106KAYNNNE, SnapEDA_Link=https://www.snapeda.com/parts/CL21A106KAYNNNE/Samsung/view-part/3598482/?ref=snap
D1_U1 D1_U2 D1_U3 D1_U4 D1_U5: "No Description Available", Mfr_Name="Diodes Inc", RefDes=RefDes, Type=Type
D2_U1 D2_U2 D2_U3 D2_U4 D2_U5: "TVS Diode (Uni-directional)", Manufacturer_Name=STMicroelectronics, Mouser Part Number=511-SM6T6V8A, Arrow Part Number=SM6T6V8A, Arrow Price/Stock=https://www.arrow.com/en/products/sm6t6v8a/stmicroelectronics?region=nac, Datasheet Link=https://www.st.com/resource/en/datasheet/sm6t100a.pdf, Height=2.65mm, Manufacturer_Part_Number=SM6T6V8A, Mouser Price/Stock=https://www.mouser.co.uk/ProductDetail/STMicroelectronics/SM6T6V8A?qs=gFQxgRPje42DFJYRsrsouA%3D%3D
D3_U1 D3_U2 D3_U3 D3_U4 D3_U5: "LED", Manufacturer_Name=Dialight, Datasheet Link=https://s3-us-west-2.amazonaws.com/catsy.557/C18686.pdf, Height=0.8128mm, Manufacturer_Part_Number=598-2105-107F
D4_U1 D4_U2 D4_U3 D4_U4 D4_U5: "LED", Arrow Part Number=19-217/GHC-YR1S2/3T, Manufacturer_Name=Everlight, Mouser Part Number=638-19217GHCYR1S23T, Arrow Price/Stock=https://www.arrow.com/en/products/19-217ghc-yr1s23t/everlight-electronics, Datasheet Link=https://www.mouser.co.uk/datasheet/2/143/19-217-GHC-YR1S2-3T-1663276.pdf, Height=0.5mm, Manufacturer_Part_Number=19-217/GHC-YR1S2/3T, Mouser Price/Stock=https://www.mouser.co.uk/ProductDetail/Everlight/19-217-GHC-YR1S2-3T?qs=8cKuZ6Ok2lZjmFTUzVFjDg%3D%3D
F1_U1 F1_U2 F1_U3 F1_U4 F1_U5: "Fuse", Manufacturer_Name=Bourns, Mouser Part Number=652-MF-MSMF150-2, Arrow Part Number=MF-MSMF150-2, Arrow Price/Stock=https://www.arrow.com/en/products/mf-msmf150-2/bourns?region=nac, Datasheet Link=https://componentsearchengine.com/Datasheets/2/MF-MSMF150-2.pdf, Height=0.85mm, Manufacturer_Part_Number=MF-MSMF150-2, Mouser Price/Stock=https://www.mouser.co.uk/ProductDetail/Bourns/MF-MSMF150-2?qs=VJkZAnU6DY2RTCSZT8Bxqg%3D%3D
IC1_U1 IC1_U2 IC1_U3 IC1_U4 IC1_U5: "Integrated Circuit", Manufacturer_Name=Microchip, Mouser Part Number=556-ATTINY1624-SSU, Arrow Part Number=ATTINY1624-SSU, Arrow Price/Stock=https://www.arrow.com/en/products/attiny1624-ssu/microchip-technology?region=nac, Datasheet Link=https://ww1.microchip.com/downloads/en/DeviceDoc/ATtiny1624-26-27-DataSheet-DS40002234A.pdf, Height=1.75mm, Manufacturer_Part_Number=ATTINY1624-SSU, Mouser Price/Stock=https://www.mouser.co.uk/ProductDetail/Microchip-Technology/ATTINY1624-SSU?qs=vmHwEFxEFR%2FHKYGUmUC%2Fzw%3D%3D
J1 J2 J3: "Connector", Manufacturer_Name="Keystone Electronics", Mouser Part Number=534-7790, Arrow Part Number=7790, Arrow Price/Stock=https://www.arrow.com/en/products/7790/keystone-electronics?region=europe, Datasheet Link=https://www.digikey.co.uk/product-detail/en/keystone-electronics/7790/36-7790-ND/2171010, Height=7.9mm, Manufacturer_Part_Number=7790, Mouser Price/Stock=https://www.mouser.co.uk/ProductDetail/Keystone-Electronics/7790?qs=zBlGwAMnvtdjBTIaaitQnQ%3D%3D
Power Thermal: "Connector", Manufacturer_Name=Molex, Mouser Part Number=538-212528-1001, Datasheet Link=https://www.molex.com/pdm_docs/sd/2125280200_sd.pdf, Height=8.8mm, Manufacturer_Part_Number=212528-1001, Mouser Price/Stock=https://www.mouser.co.uk/ProductDetail/Molex/212528-1001?qs=W%2FMpXkg%252BdQ4hWZ2b%252Bpt5GQ%3D%3D
Q1_U1 Q1_U2 Q1_U3 Q1_U4 Q1_U5: "No Description Available", Mfr_Name="Alpha and Omega Semiconductor", RefDes=RefDes, Type=Type
R1_U1 R1_U2 R1_U3 R1_U4 R1_U5 R2_U1 R2_U2 R2_U3 R2_U4 R2_U5 R5_U1 R5_U2 R5_U3 R5_U4 R5_U5 R15_U1 R15_U2 R15_U3 R15_U4 R15_U5 R20_U1 R20_U2 R20_U3 R20_U4 R20_U5 R21_U1 R21_U2 R21_U3 R21_U4 R21_U5: Package=None, Availability=Unavailable, Price=None
  R1_U1 R1_U2 R1_U3 R1_U4 R1_U5: MP=ERA6ARW104V
  R2_U1 R2_U2 R2_U3 R2_U4 R2_U5: MP=ERJU06J102V
  R5_U1 R5_U2 R5_U3 R5_U4 R5_U5: MP=ERJ6ENF1800V
  R15_U1 R15_U2 R15_U3 R15_U4 R15_U5 R20_U1 R20_U2 R20_U3 R20_U4 R20_U5 R21_U1 R21_U2 R21_U3 R21_U4 R21_U5: MP=ERJP06D1002V
R6_U1 R6_U2 R6_U3 R6_U4 R6_U5 R8_U1 R8_U2 R8_U3 R8_U4 R8_U5 R10_U1 R10_U2 R10_U3 R10_U4 R10_U5 R22_U1 R22_U2 R22_U3 R22_U4 R22_U5 R24_U1 R24_U2 R24_U3 R24_U4 R24_U5 R25_U1 R25_U2 R25_U3 R25_U4 R25_U5 R26_U1 R26_U2 R26_U3 R26_U4 R26_U5 R27_U1 R27_U2 R27_U3 R27_U4 R27_U5 R28_U1 R28_U2 R28_U3 R28_U4 R28_U5: library part CMP-03412-037828-1, "RES SMD 0 OHM JUMPER 3/4W 2010", Case Code (Imperial)=2010, Case Code (Metric)=5025, Max Operating Temperature=155°C, Max Power Dissipation=750mW, Min Operating Temperature=-55°C, Resistance=0mR, Resistance Tolerance=5%, Resistor Type="Thick Film", Temperature Coefficient=200ppm/°C, Voltage Rating=200V, Case/Package=2010, Construction=Rectangular, Contact Plating=Tin, Depth=2.5mm, Features="Moisture Resistant", Height=0.026inch, Lead Free="Lead Free", Length=0.197inch, Military Standard=Not, Number of Terminations=2, Packaging="Tape and Reel", Power Rating=750mW, Radiation Hardening=No, RoHS Compliant=Yes, Series=RC, Size Code=2010, Termination=SMD/SMT, Tolerance=5%, Width=0.098inch
R14_U1 R14_U2 R14_U3 R14_U4 R14_U5: "RES SMD 510 OHM 0.5% 1/8W 1206", Package=None, Availability=Unavailable, MP=RT1206DRD07510RL, Price=None
R16_U1 R16_U2 R16_U3 R16_U4 R16_U5 R17_U1 R17_U2 R17_U3 R17_U4 R17_U5 R18_U1 R18_U2 R18_U3 R18_U4 R18_U5: "Resistor", Manufacturer_Name=ROYALOHM, Mouser Part Number=303-0805W8F2201T5E, Datasheet Link=https://www.mouser.fr/datasheet/2/1365/GeneralPurpose-2498088.pdf, Height=0.65mm, Manufacturer_Part_Number=0805W8F2201T5E, Mouser Price/Stock=https://www.mouser.co.uk/ProductDetail/Royalohm/0805W8F2201T5E?qs=e8oIoAS2J1RJNRSZp0Nryw%3D%3D
R19_U1 R19_U2 R19_U3 R19_U4 R19_U5: "Thermistor", Manufacturer_Name=Vishay, Mouser Part Number=594-NTCS0805E3104GMT, Datasheet Link=http://www.vishay.com/docs/29044/ntcs0805e3t.pdf, Height=0.95mm, Manufacturer_Part_Number=NTCS0805E3104GMT, Mouser Price/Stock=https://www.mouser.co.uk/ProductDetail/Vishay-BC-Components/NTCS0805E3104GMT?qs=%2FWiulJ9oly70BwjDbuc51g%3D%3D
Rx Tx: "Connector Header Through Hole 2 position 0.098 (2.50mm)", Package=None, Check_prices=https://www.snapeda.com/parts/B2B-XH-A(LF)(SN)/JST+Sales+America+Inc./view-part/?ref=eda, MF="JST Sales America Inc.", MP=B2B-XH-A(LF)(SN), SnapEDA_Link=https://www.snapeda.com/parts/B2B-XH-A(LF)(SN)/JST+Sales+America+Inc./view-part/?ref=snap
U1_U1 U1_U2 U1_U3 U1_U4 U1_U5: "Integrated Circuit", Arrow Part Number=EL3H7(B)(TA)-G, Manufacturer_Name=Everlight, Mouser Part Number=638-EL3H7BTAG, Arrow Price/Stock=https://www.arrow.com/en/products/el3h7-b-ta-g/everlight-electronics?region=nac, Datasheet Link=https://www.arrow.com/en/products/el3h7-b-ta-g/everlight-electronics?region=nac, Height=2mm, Manufacturer_Part_Number=EL3H7(B)(TA)-G, Mouser Price/Stock=https://www.mouser.co.uk/ProductDetail/Everlight/EL3H7BTA-G?qs=8PzhAHr7IdM%252B0XGOXhFFCg%3D%3D
UPDU1_U1 UPDU1_U2 UPDU1_U3 UPDU1_U4 UPDU1_U5: "Connector Header position", Package=None, Availability="In Stock", Check_prices=https://www.snapeda.com/parts/TS-103-T-A-1/Samtec/view-part/?ref=eda, MF=Samtec, MP=TS-103-T-A-1, Price=None, Purchase-URL=https://pricing.snapeda.com/search/part/TS-103-T-A-1/?ref=eda, SnapEDA_Link=https://www.snapeda.com/parts/TS-103-T-A-1/Samtec/view-part/?ref=snap

## Via types
v1: diameter 23.62, hole 11.81, Top Layer to Bottom Layer, 183 vias
v2: diameter 23.62, hole 11.81, Top Layer to Bottom Layer, tented both sides, 2 vias

## Nets (pads, with @x,y where several pads share a name; then routed paths per layer and width w, separated by ;. In a path a pad name is that pad's centre, name@x,y a point inside that pad or via, vN(x,y) a via of type N, cw(c..) or ccw(c..) an arc to the next point about the centre after c; other vN are vias at no path point)
DUMP_LOAD_ENABLE_U1: IC1_U1.8 R14_U1.1 | length 1195.4
  Top Layer w15: v1(2048,2089) 2048.27,2089.27 R14_U1.1@2048.27,2140 ; IC1_U1.8@3076.3,2143.45 v1(3123,2143.45)
  Bottom Layer w15: v1(2048,2089) 2064,2105 3084.55,2105 v1(3123,2143.45)
DUMP_LOAD_ENABLE_U2: IC1_U2.8 R14_U2.1 | length 1902.2
  Top Layer w15: v1(2048,2540) 2048.27,2540.27 R14_U2.1@2048.27,2590 ; IC1_U2.8@3076.3,2617.58 3106.42,2617.58 v1(3123,2601)
  Bottom Layer w15: v1(2048,2540) 2053.38,2534.62 2596.21,2534.62 2605,2525.83 2605,2478 2500.54,2373.54 2475.54,2373.54 2402,2300 2402,2262.5 2416.92,2247.58 2769.58,2247.58 v1(3123,2601)
DUMP_LOAD_ENABLE_U3: IC1_U3.8 R14_U3.1 | length 1282.1
  Top Layer w15: R14_U3.1@2048.27,3060 v1(2048.27,3113) ; IC1_U3.8@3076.3,3091.72 3123,3091.72 v1(3123,3112)
  Bottom Layer w15: v1(2048.27,3113) 2490.3,3113 2595.3,3218 2683,3218 2708.31,3192.69 2868.31,3192.69 2924.62,3136.38 2954.01,3136.38 2978.39,3112 v1(3123,3112)
DUMP_LOAD_ENABLE_U4: IC1_U4.8 R14_U4.1 | length 1559.7
  Top Layer w15: v1(2048.27,3489) R14_U4.1@2048.27,3540 ; v1(3015.14,3538) 3043,3565.86 IC1_U4.8@3076.3,3565.86
  Bottom Layer w15: v1(2048.27,3489) 2012.27,3453 1925,3453 1907,3471 1907,3542.78 2016.22,3652 2148.5,3652 2181.5,3619 2598.31,3619 2679.31,3538 v1(3015.14,3538)
DUMP_LOAD_ENABLE_U5: IC1_U5.8 R14_U5.1 | length 1728.9
  Top Layer w15: v1(2048,3984) 2048.27,3984.27 R14_U5.1@2048.27,4035 ; v1(2939,4040) IC1_U5.8@3076.3,4040
  Bottom Layer w15: v1(2048,3984) 2355,3984 2473.58,4102.58 2536.65,4102.58 2599.22,4040 2635.65,4003.58 2635.65,3983.44 2621.41,3969.2 2566.95,3969.2 2560.84,3975.31 2423.93,3975.31 2409.69,3961.07 2409.69,3940.93 2423.93,3926.69 2825.69,3926.69 v1(2939,4040)
"ENABLE U3": IC1_U3.13 R21_U3.2 Thermal.8 | length 7089.9
  Top Layer w15: v1(1861.26,2943.26) R21_U3.2@1861.26,3007.26 ; v1(3029.96,3341.72) IC1_U3.13@3076.3,3341.72 ; v1(4010,3617) 4010,2550 4096,2464 4212.5,2464 4236,2487.5 4236,2582 Thermal.8@4192.6,2625.4
  Bottom Layer w15: v1(1861.26,2943.26) 1837,2919 1699,2919 1511.45,2731.45 1434,2731.45 1434,2181.21 1803.71,1811.5 3510.5,1811.5 3699,2000 3699,2131.8 Thermal.8@4192.6,2625.4 ; v1(3029.96,3341.72) 3734.72,3341.72 v1(4010,3617)
"ENABLE U4": IC1_U4.13 R21_U4.2 Thermal.9 | length 4057.3
  Top Layer w15: v1(1861,3436) 1861,3474.74 R21_U4.2@1861.26,3475 ; v1(3030,3797) 3030,3800 3045.86,3815.86 IC1_U4.13@3076.3,3815.86 ; v1(4048,3778) 4064,3762 4064,2635.89 Thermal.9@4192.6,2507.29
  Bottom Layer w15: v1(1861,3436) 1871,3446 1871,3585 1958,3672 2158,3672 2186,3644 3118,3644 3148,3674 3148,3750 3120,3778 ; v1(3030,3797) 3049,3778 3120,3778 ; v1(4048,3778) 3120,3778
"ENABLE U5": IC1_U5.13 R21_U5.2 Thermal.10 | length 5728.5
  Top Layer w15: v1(1861.26,3916) R21_U5.2@1861.26,3955 ; v1(3009,4315) 3033.08,4290.92 3075.38,4290.92 IC1_U5.13@3076.3,4290 3093.03,4290 3203.03,4180 v2(3240,4180) ; v2(3735,4175) 3888.14,4175 4068.22,4355.08 4219.03,4355.08 4316.77,4257.34 4316.77,4255.97 4403.6,4169.14 4403.6,3642.89 4476.93,3569.57 4476.93,3032.49 4403.6,2959.16 4403.6,2422.08 4328.28,2346.76 4235.02,2346.76 Thermal.10@4192.6,2389.18
  Bottom Layer w15: v1(1861.26,3916) 1701,3916 1644,3973 1644,4331 1700,4387 2937,4387 v1(3009,4315) ; v2(3240,4180) 3245,4175 v2(3735,4175)
ENABLE_U1: IC1_U1.9 R19_U1.1 Thermal.6 | length 2810.1
  Top Layer w15: v1(3030,2218) 3030,2193.45 IC1_U1.9@3076.3,2193.45 ; v1(3509.84,2193) 3556.04,2193 3563.31,2200.26 R19_U1.1@3563.31,2210
  Bottom Layer w15: v1(3030,2218) 3484.84,2218 ; v1(3509.84,2193) 3484.84,2218 ; Thermal.6@4192.6,2861.62 4192.6,2828.4 4236,2785 4236,2724.59 4212.5,2701.09 3526.09,2701.09 3334,2509 3081,2509 3005,2433 3005,2250 3022.24,2232.76 3470.08,2232.76 3484.84,2218
ENABLE_U2: IC1_U2.9 R19_U2.1 Thermal.7 | length 1928.6
  Top Layer w15: v1(3030,2668) 3030.42,2667.58 IC1_U2.9@3076.3,2667.58 ; v1(3563,2730) 3563.31,2730.31 R19_U2.1@3563.31,2775
  Bottom Layer w15: v1(3030,2668) 3421,2668 3496.51,2743.51 Thermal.7@4192.6,2743.51 4192.6,2730 v1(3563,2730)
ENABLE_U3: IC1_U3.9 R19_U3.1 Thermal.3 | length 4074.2
  Top Layer w15: v1(3030,3141.72) IC1_U3.9@3076.3,3141.72 ; v1(3563.31,3295.69) 3563.31,3375 3592.31,3404 3703,3404 3724,3425 3724,3825 3710,3839 3676,3839 3646,3869 3646,3987.21 3654.79,3996 3735.21,3996 3744,4004.79 3744,4087 3800,4143 4357,4143 4383.6,4116.4 4383.6,3631.6 4456.93,3558.27 4456.93,3055.66 4383.6,2982.33 4383.6,2698.3 Thermal.3@4310.71,2625.4
  Bottom Layer w15: v1(3030,3141.72) 3000,3171.72 3000,3261.21 3008.79,3270 3496,3270 3521,3295 3562.62,3295 v1(3563.31,3295.69)
ENABLE_U4: IC1_U4.9 R19_U4.1 Thermal.4 Thermal.5 | length 3088.8
  Top Layer w15: IC1_U4.9@3076.3,3615.86 v1(3255,3615.86) ; v1(3563.31,3615.86) R19_U4.1@3563.31,3905 ; v1(4090,3710) 4090,2872 4150,2812 4195,2812 4263,2744 4263,2555 Thermal.4@4310.71,2507.29 Thermal.5@4310.71,2389.18
  Bottom Layer w15: v1(3563.31,3615.86) v1(3255,3615.86) 3349,3710 v1(4090,3710)
ENABLE_U5: IC1_U5.9 R19_U5.1 | length 979.1
  Top Layer w15: v1(3005,4222) 3005,4125 3040,4090 IC1_U5.9@3076.3,4090 ; v1(3515,4530) 3517.09,4530 3563.31,4483.78 R19_U5.1@3563.31,4470
  Bottom Layer w15: v1(3005,4222) 3071.31,4222 3094.27,4244.96 3094.27,4377.27 3247,4530 v1(3515,4530)
NetD3_U1_2: D3_U1.2 R17_U1.1 | length 123.3
  Top Layer w15: D3_U1.2@2726.57,2125 2726.57,2237.13 R17_U1.1@2734.44,2245
NetD3_U2_2: D3_U2.2 R17_U2.1 | length 128.3
  Top Layer w15: D3_U2.2@2726.57,2580 2734.44,2587.87 R17_U2.1@2734.44,2705
NetD3_U3_2: D3_U3.2 R17_U3.1 | length 128.3
  Top Layer w15: D3_U3.2@2726.57,3045 2734.44,3052.87 R17_U3.1@2734.44,3170
NetD3_U4_2: D3_U4.2 R17_U4.1 | length 123.3
  Top Layer w15: D3_U4.2@2726.57,3520 2726.57,3632.13 R17_U4.1@2734.44,3640
NetD3_U5_2: D3_U5.2 R17_U5.1 | length 128.3
  Top Layer w15: D3_U5.2@2726.57,4010 2726.57,4127.13 R17_U5.1@2734.44,4135
NetD4_U1_1: D4_U1.1 R18_U1.1 | length 124.5
  Top Layer w15: D4_U1.1@1845.47,2180 1845.47,2234 1856.38,2244.91 R18_U1.1@1856.38,2300
NetD4_U2_1: D4_U2.1 R18_U2.1 | length 134.5
  Top Layer w15: D4_U2.1@1841.5,2645 1841.5,2704 1852.4,2714.91 R18_U2.1@1852.4,2775
NetD4_U3_1: D4_U3.1 R18_U3.1 | length 130.5
  Top Layer w15: D4_U3.1@1839.13,3115 1839.13,3170 1852.4,3183.27 R18_U3.1@1852.4,3240
NetD4_U4_1: D4_U4.1 R18_U4.1 | length 133.2
  Top Layer w15: D4_U4.1@1839.13,3585 1839.13,3640 1854.88,3655.75 R18_U4.1@1854.88,3711.72
NetD4_U5_1: D4_U5.1 R18_U5.1 | length 135.7
  Top Layer w15: D4_U5.1@1839.13,4070 1839.13,4126 1854.88,4141.75 R18_U5.1@1854.88,4199.22
NetQ1_U1_1: Q1_U1.1 R14_U1.2 R15_U1.1 | length 1959.1
  Top Layer w15: R14_U1.2@1931.73,2140 1931.73,2089.27 v1(1932,2089) ; R15_U1.1@2382.64,2170 v1(2382.64,2130.55) 2382.64,2091.36 2623,1851 2862.5,1851 2879,1867.5 2879,1939 2769,2049 2769,2248 2799,2278 2799,2425 2781.54,2442.46 Q1_U1.1@2663,2442.46
  Bottom Layer w15: v1(1932,2089) 1971.65,2128.65 2380.74,2128.65 v1(2382.64,2130.55)
NetQ1_U1_3: Q1_U1.3 R10_U1.2 R17_U1.2 R27_U1.2 R28_U1.2 | length 1760
  Top Layer w15: v1(2659.64,2200) R17_U1.2@2659.64,2245 2757,2342.36 Q1_U1.3@2757,2404.96 ; v1(3224,2119) 3224,2069.35 3179.65,2025 R28_U1.2@3179.65,1965 3242.65,1902 3404.32,1902 R27_U1.2@3437.32,1935 3437.32,1871.68 3500,1809 3601.32,1809 3692.32,1900 R10_U1.2@3692.32,1965
  Bottom Layer w15: v1(2659.64,2200) 2691.88,2167.76 3175.24,2167.76 v1(3224,2119)
NetQ1_U2_1: Q1_U2.1 R14_U2.2 R15_U2.1 | length 1554.6
  Top Layer w15: v1@1948.33,2539.77 1948.33,2542.11 1943.33,2547.11 1943.33,2578.41 R14_U2.2@1931.73,2590 1931.73,2643 1982,2693.27 1982,2734.34 2040.69,2793.03 2040.69,2886.69 2109,2955 2560.88,2955 2584.21,2931.67 2584.21,2912.17 2600.5,2895.88 Q1_U2.1@2663,2895.88 ; v1(2318.08,2583.36) 2341,2583.36 R15_U2.1@2382.64,2625
  Bottom Layer w15: v1(1949.1,2539) 1993.46,2583.36 v1(2318.08,2583.36)
NetQ1_U2_3: Q1_U2.3 R10_U2.2 R17_U2.2 R27_U2.2 R28_U2.2 | length 1757.6
  Top Layer w15: R17_U2.2@2659.64,2705 2659.64,2747 2757,2844.36 ; Q1_U2.3@2757,2858.38 2757,2844.36 ; R10_U2.2@3692.32,2545 3692.32,2576.5 3680.96,2587.86 3668.79,2587.86 3660,2596.65 3660,2687.5 3643.5,2704 3579,2704 3525,2650 3525,2601.68 3437.32,2514 R27_U2.2@3437.32,2499.21 3437.32,2494.91 3404.55,2462.14 3303.64,2462.14 3220.78,2545 R28_U2.2@3179.65,2545 3179.65,2522 2820,2522 2767,2575 2767,2751.27 2746.69,2771.58 2746.69,2816.9 2757,2827.21 2757,2844.36
NetQ1_U3_1: Q1_U3.1 R14_U3.2 R15_U3.1 | length 1049.4
  Top Layer w15: v1(1931.73,3009.54) R14_U3.2@1931.73,3060 ; v1(2382.64,3055.55) R15_U3.1@2382.64,3095 2460.18,3172.54 2460.18,3241.87 2483.31,3265 2562,3265 2575,3278 2575,3350.61 2600,3375.61 Q1_U3.1@2663,3375.61
  Bottom Layer w15: v1(1931.73,3009.54) 1989.51,3067.31 2370.88,3067.31 v1(2382.64,3055.55)
NetQ1_U3_3: Q1_U3.3 R10_U3.2 R17_U3.2 R27_U3.2 R28_U3.2 | length 1689.3
  Top Layer w15: R17_U3.2@2659.64,3170 2757,3267.36 Q1_U3.3@2757,3338.11 2757,3350 2831,3424 3125,3424 3147,3402 3147,3233.65 3179.65,3201 R28_U3.2@3179.65,3165 3281.23,3063.42 R27_U3.2@3437.32,3063.42 3437.32,3078 3525,3165.68 3525,3243 3553.38,3271.38 3641.21,3271.38 3650,3262.59 3650,3177.5 3662.5,3165 R10_U3.2@3692.32,3165
NetQ1_U4_1: Q1_U4.1 R14_U4.2 R15_U4.1 | length 1117.8
  Top Layer w15: v1(1931.73,3489) R14_U4.2@1931.73,3540 ; v1(2343.19,3515.55) R15_U4.1@2382.64,3555 2460.18,3632.54 2460.18,3699.87 2474.6,3714.29 2695.58,3714.29 2710,3728.71 2710,3825 2694.39,3840.61 Q1_U4.1@2663,3840.61
  Bottom Layer w15: v1(1931.73,3489) 1958.28,3515.55 v1(2343.19,3515.55)
NetQ1_U4_3: Q1_U4.3 R10_U4.2 R17_U4.2 R27_U4.2 R28_U4.2 | length 1646.6
  Top Layer w15: R17_U4.2@2659.64,3640 2659.64,3641.28 2757,3738.64 Q1_U4.3@2757,3803.11 2760.5,3806.61 2776.61,3806.61 2799,3829 2799,3882 2832.17,3915.17 3075.36,3915.17 3101.5,3941.31 3130.69,3941.31 3147,3925 3147,3824.14 3179.65,3791.5 R28_U4.2@3179.65,3760 3312.01,3627.63 R27_U4.2@3437.32,3627.63 3437.32,3608 3466.32,3579 3566.77,3579 3581,3564.77 3657.1,3564.77 3692.32,3600 R10_U4.2@3692.32,3760
NetQ1_U5_1: Q1_U5.1 R14_U5.2 R15_U5.1 | length 1617.7
  Top Layer w15: v1(1931.73,3975.73) R14_U5.2@1931.73,4035 ; v1(1971,4040) 1971,4219 2231,4479 2478.5,4479 2625,4332.5 Q1_U5.1@2663,4332.5 ; v1(2342.64,4015) R15_U5.1@2382.64,4055
  Bottom Layer w15: v1(1931.73,3975.73) 1971,4015 1996,4015 ; v1(1971,4040) 1996,4015 ; v1(2342.64,4015) 1996,4015
NetQ1_U5_3: Q1_U5.3 R10_U5.2 R17_U5.2 R27_U5.2 R28_U5.2 | length 1517.6
  Top Layer w15: R17_U5.2@2659.64,4135 2659.64,4136.28 2757,4233.64 Q1_U5.3@2757,4295 2792.5,4295 2810,4312.5 2810,4350 2847,4387 3150,4387 3179.65,4357.35 R28_U5.2@3179.65,4305 3292.8,4191.84 R27_U5.2@3437.32,4191.84 3437.32,4140.68 3450,4128 3653,4128 3692.32,4167.32 R10_U5.2@3692.32,4305
NetR5_U1_2: R5_U1.2 U1_U1.1 | length 286.8
  Top Layer w15: R5_U1.2@1935.28,2258.49 1935.28,2299.14 2025,2388.87 2025,2416.87 2000,2441.87 U1_U1.1@1944.13,2441.87
NetR5_U2_2: R5_U2.2 U1_U2.1 | length 243.2
  Top Layer w15: R5_U2.2@1935.28,2710.21 1935.28,2743.46 1988,2796.18 1988,2882.29 1975,2895.29 U1_U2.1@1944.13,2895.29
NetR5_U3_2: R5_U3.2 U1_U3.1 | length 289.1
  Top Layer w15: R5_U3.2@1935.28,3185.07 1935.28,3238.28 2021.98,3324.98 2021.98,3350 1996.96,3375.02 U1_U3.1@1944.13,3375.02
NetR5_U4_2: R5_U4.2 U1_U4.1 | length 240.5
  Top Layer w15: R5_U4.2@1935.28,3657.57 1972.66,3694.95 1972.66,3712.71 1988,3728.05 1988,3827.02 1975,3840.02 U1_U4.1@1944.13,3840.02
NetR5_U5_2: R5_U5.2 U1_U5.1 | length 698.4
  Top Layer w15: v1(1897,4330) U1_U5.1@1944.13,4330.02 ; v1(1935,4206) 1935,4150.34 R5_U5.2@1935.28,4150.07
  Bottom Layer w15: v1(1897,4330) 1682.5,4330 1665,4312.5 1665,4241 1700,4206 v1(1935,4206)
NetR6_U1_2: R6_U1.2 R8_U1.1 | length 267.6
  Top Layer w15: R8_U1.1@3692.32,2135 3692.32,2172.29 3825.03,2305 R6_U1.2@3867.68,2305
NetR6_U2_2: R6_U2.2 R8_U2.1 | length 245.8
  Top Layer w15: R8_U2.1@3692.32,2715 3862.32,2885 R6_U2.2@3867.68,2885
NetR6_U3_2: R6_U3.2 R8_U3.1 | length 243.7
  Top Layer w15: R8_U3.1@3692.32,3330 3857.32,3495 R6_U3.2@3867.68,3495
NetR6_U4_2: R6_U4.2 R8_U4.1 | length 240.6
  Top Layer w15: R8_U4.1@3692.32,3917.5 3710.18,3917.5 R6_U4.2@3867.68,4075
NetR6_U5_2: R6_U5.2 R8_U5.1 | length 235.4
  Top Layer w15: R8_U5.1@3692.32,4450 3837.32,4595 R6_U5.2@3867.68,4595
NetR8_U1_2: R8_U1.2 R10_U1.1 | length 170
  Top Layer w15: R10_U1.1@3867.68,1965 R8_U1.2@3867.68,2135
NetR8_U2_2: R8_U2.2 R10_U2.1 | length 170
  Top Layer w15: R10_U2.1@3867.68,2545 R8_U2.2@3867.68,2715